# Altium PCB PPSDriver.PcbDoc
Units mil, origin at the board's own origin, x right, y up, seen from the top; angles counter-clockwise.
Board outline 1245 x 800 mil, 2 copper layers (L1, L2), stack 62.8 mil thick; 19 components, 18 nets, 78 pads, 6 vias.
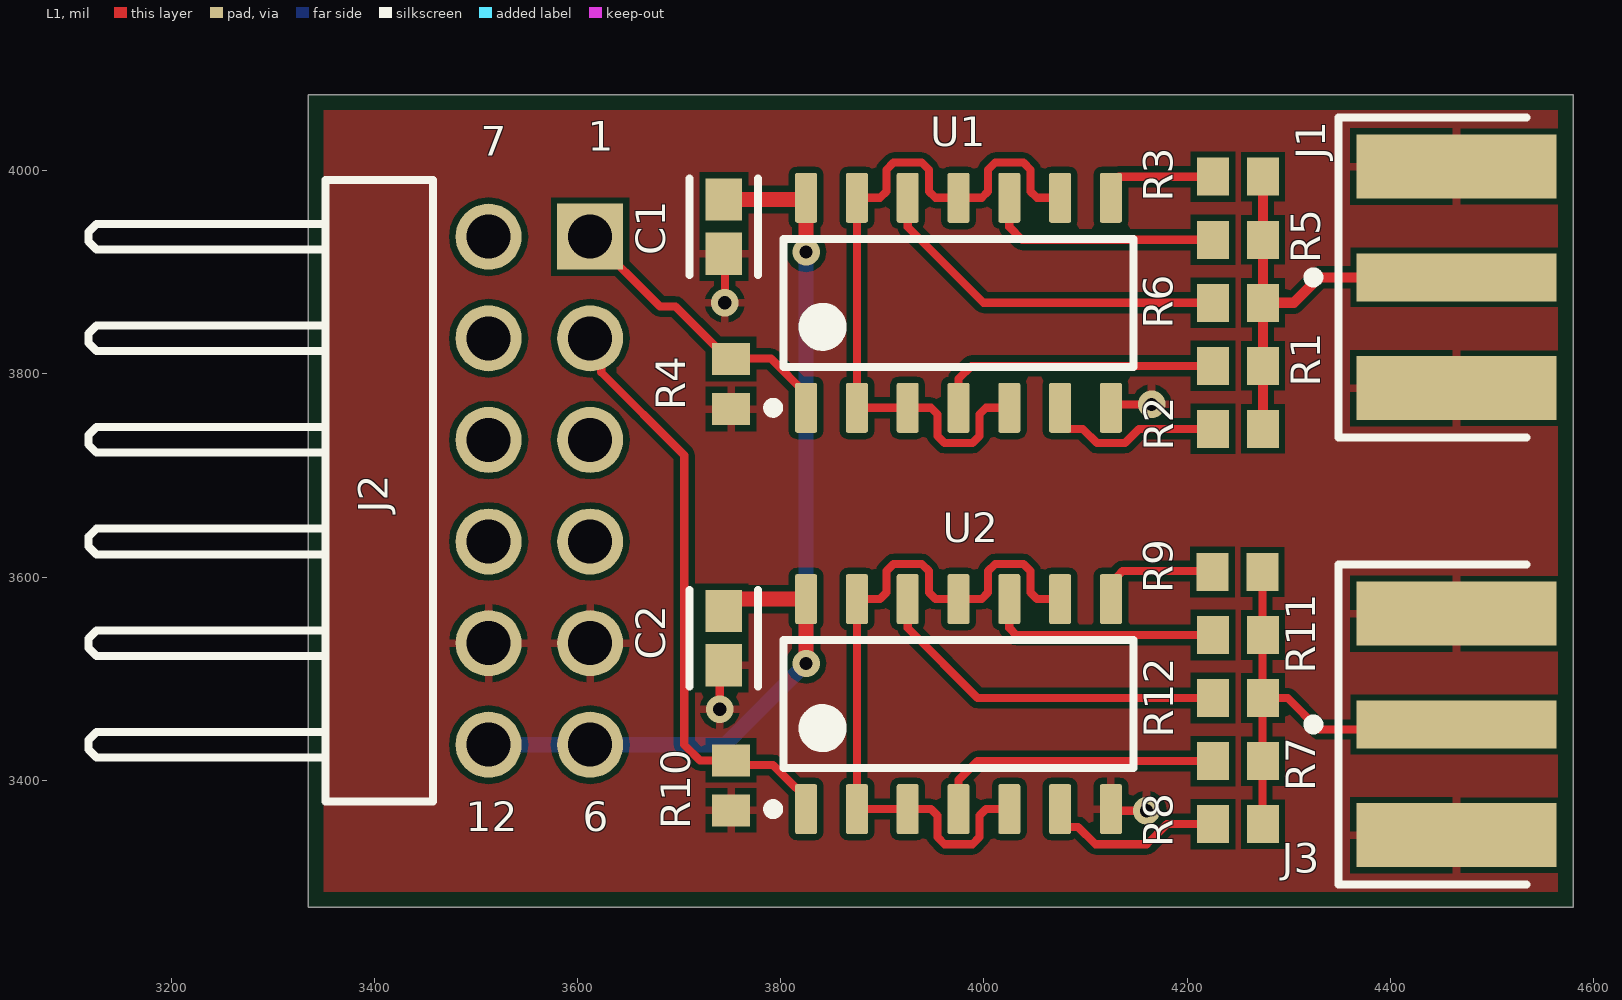
[diagram p0: L1 view]
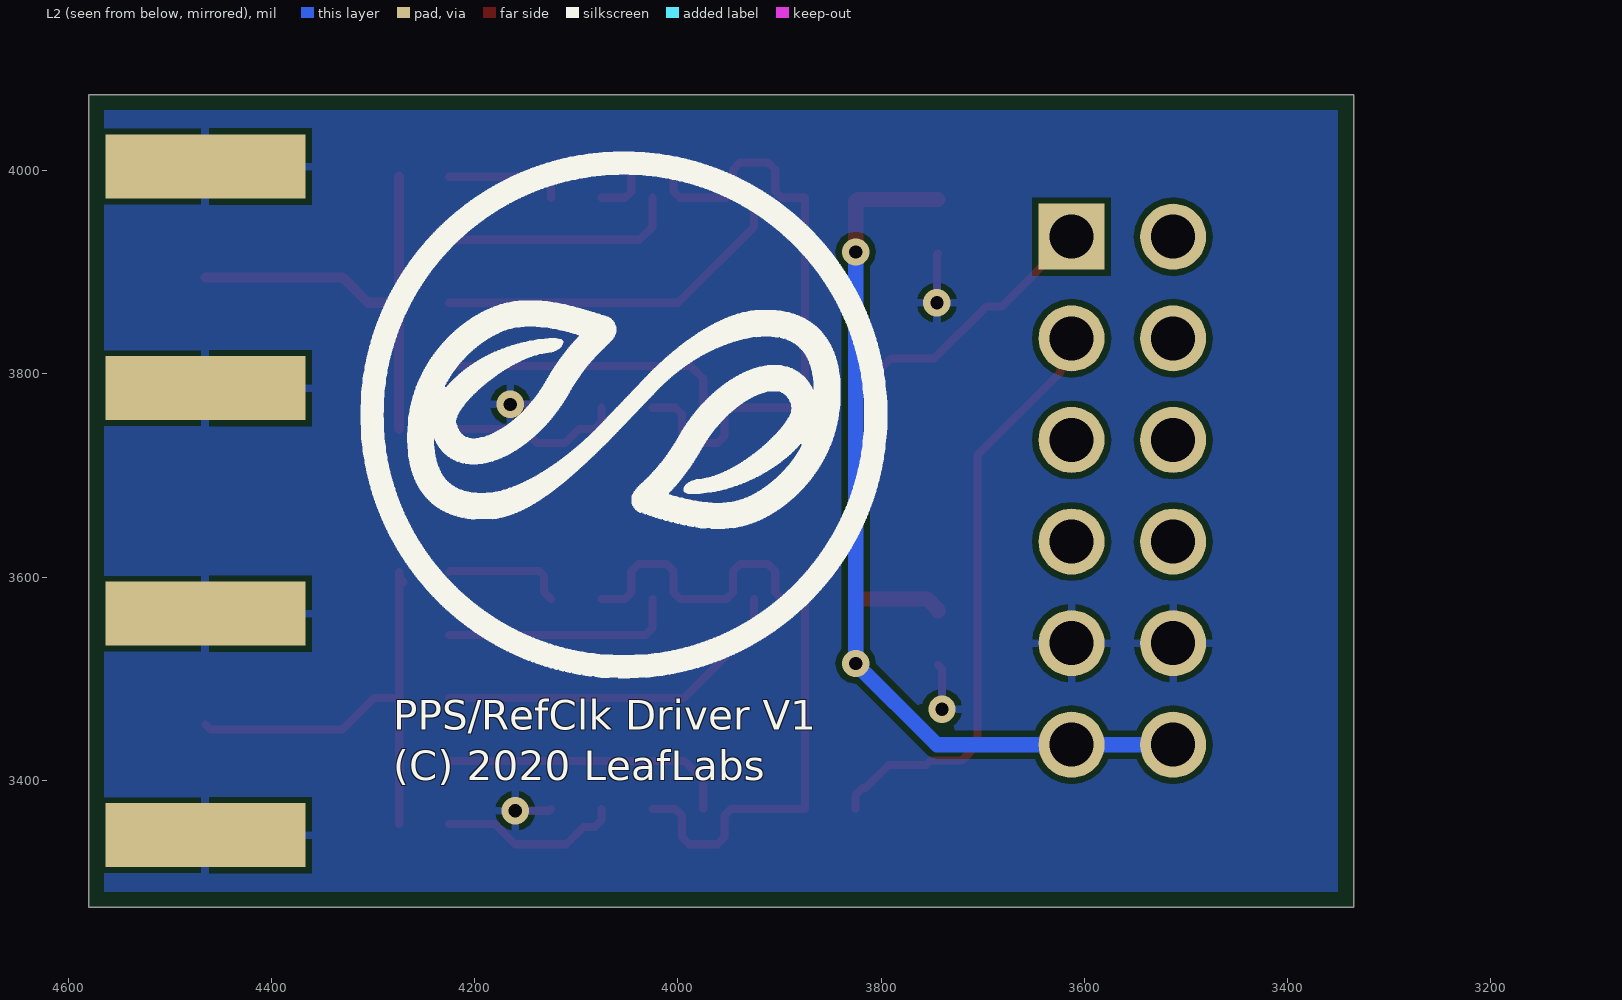
[diagram p1: L2 view, seen from below]

## Layer stack, top to bottom
Top Solder: solder mask 0.1, Solder Resist, Dk 1
L1: signal copper 1.4
Core: core 60, FR-4, Dk 4.6
L2: signal copper 1.4
Bottom Solder: solder mask 0.1, Solder Resist, Dk 1

## Board outline
3335,3275 4580,3275 4580,4075 3335,4075

## Design rules (kind name [scope] priority, off if disabled: settings)
BoardOutlineClearance [All] p1: gap=15 ignorepadtopadclearanceinfootprint=FALSE
Clearance [All] p1: gap=6 ignorepadtopadclearanceinfootprint=FALSE except(0: Arc-Hole Track-Hole SMDPad-Hole THPad-Hole Via-Hole Fill-Hole Poly-Hole Region-Hole Text-Hole)
ComponentClearance [All] p1: gap=1 collisioncheckmode=3 verticalgap=1 showdistances=FALSE
DiffPairsRouting [All] p1: maxlimit=393.7 minlimit=6 mostfreqgap=8 toplayer_minwidth=6 toplayer_maxwidth=15 toplayer_prefwidth=8 bottomlayer_minwidth=6 bottomlayer_maxwidth=15 bottomlayer_prefwidth=8 maxuncoupledlength=500
HoleSize [All] p1: absolutevalues=TRUE maxlimit=265 minlimit=13 maxpercent=80.000 minpercent=20.000
HoleToHoleClearance [All] p1: gap=10 allowstackedmicrovias=FALSE
MinimumAnnularRing [All] p1: minimumring=7
MinimumSolderMaskSliver [All] p1: minsoldermaskwidth=0
PlaneClearance [All] p1: clearance=10
PlaneConnect [All] p1: planeconnectstyle=Direct reliefexpansion=16 reliefentries=4 reliefconductorwidth=6 reliefairgap=6
PolygonConnect [All] p1: connectstyle=Relief reliefconductorwidth=8 reliefentries=4 polygonreliefangle="90 Angle" airgapwidth=6
RoutingCorners [All] p1: cornerstyle=45-Degree minsetback=49.21 maxsetback=49.21
RoutingVias [All] p1: holewidth=15 width=30 viastyle="Through Hole" minholewidth=13 minwidth=27 maxholewidth=100 maxwidth=114
SilkToSilkClearance [All] p1: silktosilkclearance=0
SilkToSolderMaskClearance [IsPad] p1: minsilkscreentomaskgap=6 clearancetoexposedcopper=TRUE
SolderMaskExpansion [All] p1: expansion=2.95 istentingtop=FALSE
Width [All] p1: maxlimit=400 minlimit=6 preferedwidth=8
20 further rules are at their usual default settings.

## Components (designator, comment, footprint, x,y, rotation, side; value= is the part's Value field where it differs from the comment)
C1 "0.1uF" FP-CC0603-DA-IPC_B 3744.03,3945 r270 top value="100 nF"
C2 "0.1uF" FP-CC0603-DA-IPC_B 3744.03,3540 r270 top value="100 nF"
J1 "SMA Edge" FP-CON-SMA-EDGE-S-MFG 4750.83,3895 r270 top
J2 "PMOD" PMOD 3405,3685 r270 top
J3 "SMA Edge" FP-CON-SMA-EDGE-S-MFG 4750.83,3455 r270 top
R1 "220R" RESC1609X50X30NL10T20 4250,3807.97 r0 top
R2 "220R" RESC1609X50X30NL10T20 4250,3745.93 r0 top
R3 "220R" RESC1609X50X30NL10T20 4250,3994.07 r0 top
R4 "100k" RESC1609X50X30NL10T20 3751.16,3790 r90 top
R5 "220R" RESC1609X50X30NL10T20 4250,3932.03 r0 top
R6 "220R" RESC1609X50X30NL10T20 4250,3870 r0 top
R7 "220R" RESC1609X50X30NL10T20 4250,3418.9 r0 top
R8 "220R" RESC1609X50X30NL10T20 4250,3356.87 r0 top
R9 "220R" RESC1609X50X30NL10T20 4249.66,3605 r0 top
R10 "100k" RESC1609X50X30NL10T20 3751.16,3395 r90 top
R11 "220R" RESC1609X50X30NL10T20 4250,3542.97 r0 top
R12 "220R" RESC1609X50X30NL10T20 4250,3480.93 r0 top
U1 "74LVT14D" SOIC14A_L 3975,3870 r90 top
U2 "74LVT14D" SOIC14A_L 3975,3475 r90 top

## Footprints (in the part's own frame and the unit in brackets; to place one, negate y for a bottom-side part, rotate by r counter-clockwise, add the part's x,y. Pads: shape width x height; smd on the part's side, far side on the other; paste and mask are expansions set on the pad)
FP-CC0603-DA-IPC_B [mil]
  rect 41.66x35.91 smd paste+0 mask+0: 1(-26.65,0) 2(26.65,0)
  silkscreen extent -47,-34 47,34, body extent -57,-28 57,28, height 10
FP-CON-SMA-EDGE-S-MFG [mm]
  rect 1.2x5 smd paste+0 mask+0: 1(0,-7.26)
  rect 1.6x5 smd paste+0 mask+0: 2(-2.77,-7.26) 2(2.77,-7.26)
  rect 1.6x5 smd far side paste+0 mask+0: 2(-2.77,-7.26) 2(2.77,-7.26)
  silkscreen extent -4,-10.96 4,-5.5, body extent -3.67,-9.86 3.67,4.86, height 0.25
PMOD [mm] "Pin Header, pitch 2.54 mm, THT, Angled, dual row, 12p"
  rect 1.65x1.65 hole 1.1: 1(-6.35,5.27)
  round 1.65 hole 1.1: 2(-3.81,5.27) 3(-1.27,5.27) 4(1.27,5.27) 5(3.81,5.27) 6(6.35,5.27) 7(-6.35,2.73) 8(-3.81,2.73) 9(-1.27,2.73) 10(1.27,2.73) 11(3.81,2.73) 12(6.35,2.73)
  silkscreen extent -7.77,-7.27 7.77,1.34, body extent -7.62,-7.27 7.62,5.63, height 5.12
RESC1609X50X30NL10T20 [mm] "Chip Resistor, 2-Leads, Body 1.55x0.85mm, IPC Medium Density"
  rect 0.8x0.95 smd: 1(-0.625,0) 2(0.625,0)
  body extent -0.82,-0.48 0.82,0.48, height 0.5
SOIC14A_L [mm] "SOIC, 14-Leads, Body 8.75x4mm, Pitch 1.27mm, IPC High Density"
  rrect18% 1.25x0.55 smd: 1(-2.625,3.81) 2(-2.625,2.54) 3(-2.625,1.27) 4(-2.625,0) 5(-2.625,-1.27) 6(-2.625,-2.54) 7(-2.625,-3.81) 8(2.625,-3.81) 9(2.625,-2.54) 10(2.625,-1.27) 11(2.625,0) 12(2.625,1.27) 13(2.625,2.54) 14(2.625,3.81)
  silkscreen extent -2.75,-4.38 1.6,4.76, body extent -3.02,-4.32 3.02,4.32, height 1.59

## Part data
C1 C2: library part CAP-0603-0.1uF, "CAP CER 0.1UF 16V X7R 0603", Capacitance="100 nF", Manufacturer=YAGEO, Manufacturer Part Number=CC0603KRX7R7BB104, Package=CC0603-DA, Supplier Part Number 1=311-1088-1-ND, Temperature="-55°C to +125°C", Temperature Characteristic=X7R, Temperature Coefficient=15%, Temperature Range High=+125°C, Temperature Range Low=-55°C, Tolerance=0.1, Voltage="16 V", Automotive=No, Category=Cap, ComponentLink2Description=Datasheet, ComponentLink2URL=http://www.yageo.com/documents/recent/UPY-GPHC_X7R_6.3V-to-50V_18.pdf, Device Class L1="Passive Components", Device Class L2=Capacitors, Device Class L3="Ceramic Capacitors", Digikey Description="CAP CER 0.1UF 16V X7R 0603", Footprint Url=http://www.yageo.com/exep/pages/download/literatures/UPY-C_GEN_24.pdf, Height=0.9mm, Lead Free=Yes, Material=Ceramic, Mouser Description="Multilayer Ceramic Capacitor, CC Series, 0.1 - F, - 10%, X7R, 16 V, 0603 [1608 Metric]", Octopart=https://octopart.com/cc0603krx7r7bb104-yageo-192941, RoHS=TRUE, Supplier 1=Digi-Key, Voltage Rating="16 V"
J1 J3: library part SMA_EDGE, "50 Ohm Edge mount SMA"
J2: library part PMOD-TH, "PMOD Connector, Through Hole, Standard pinout", Contact Resistance=20mOhm, Rated Current=3A, Supplier Part Number 1=732-5354-ND, Withstanding Voltage=500VAC, Gender=Male, Orientation=Angled, Pin Number=12, Pitch=2.54mm, Publisher=WurthElektronik, Row Number=Dual, Supplier 1=Digi-Key
R1 R2 R3 R5 R6 R7 R8 R9 R11 R12: library part RES-0603-220R, "Resistor 0603 220 Ohm", Supplier Part Number 1=311-220GRCT-ND, Supplier 1=Digi-Key
R4 R10: library part RES-0603-100k, "Resistor 0603 100k Ohm", Supplier Part Number 1=YAG2294CT-ND, Supplier 1=Digi-Key
U1 U2: "Hex Schmitt-Trigger Inverters, D0014A, LARGE T&R", Generic Part Number=74LVT14, Supplier Part Number 1=1727-6371-1-ND, Input Type=CMOS, Output Type=CMOS, Schmitt Trigger=Yes, Supplier 1=Digi-Key

## Via types
v1: diameter 27, hole 13, L1 to L2, 6 vias

## Nets (pads, with @x,y where several pads share a name; then routed paths per layer and width w, separated by ;. In a path a pad name is that pad's centre, name@x,y a point inside that pad or via, vN(x,y) a via of type N, cw(c..) or ccw(c..) an arc to the next point about the centre after c; other vN are vias at no path point)
+3v3: C1.1 C2.1 J2.6 J2.12 U1.14 U2.14 | length 1032.2
  L1 w15: C2.1 3744.03,3567.89 3754.48,3578.35 U2.14 v1(3825,3515) ; C1.1 3823.31,3971.65 3825,3969.96 v1(3825,3920)
  L2 w15: J2.12 J2.6 3745,3435 v1(3825,3515) v1(3825,3920)
GND: C1.2 C2.2 J1.2 J2.5 J2.11 J3.2 R4.1 R10.1 U1.7 U2.7 | length 170.8
  L1 w8: v1(3740,3470) 3740,3509.32 C2.2 ; C1.2 3745,3917.37 v1(3745,3870) ; U2.7 4126.65,3370 v1(4160,3370) ; U1.7 4128.35,3770 v1(4165,3770)
NetJ1_1: J1.1 R1.2 R2.2 R3.2 R5.2 R6.2 | length 448.9
  L1 w10: R2.2 R1.2 R6.2 ; R3.2 R5.2 R6.2 ; J1.1 4330,3895 4305,3870 R6.2
NetJ2_1: J2.1 R4.2 U1.1 | length 290.6
  L1 w8: J2.1 3681.04,3866.44 3696.37,3866.44 3748.2,3814.61 3748.6,3815 3790.43,3815 3825,3780.43 U1.1
NetJ2_2: J2.2 R10.2 U2.1 | length 592.6
  L1 w8: J2.2 3623.38,3824.1 3623.38,3801.62 3705,3720 3705,3435 3720.39,3419.61 R10.2 3755.76,3415 3792.46,3415 3815.2,3392.26 3818.17,3392.26 3825,3385.43 U2.1
NetJ3_1: J3.1 R7.2 R8.2 R9.2 R11.2 R12.2 | length 459.6
  L1 w8: R9.2@4270,3595 R9.2@4274.27,3599.27 ; R9.2 R9.2@4274.27,3599.27 ; R8.2 4274.27,3357.21 R9.2@4274.27,3599.27 ; R12.2 4299.07,3480.93 4330,3450 4460,3450 J3.1
NetR1_1: R1.1 U1.4 | length 284.3
  L1 w8: U1.4 3975,3795.26 3987.71,3807.97 R1.1
NetR2_1: R2.1 U1.6 | length 178.6
  L1 w8: U1.6 4075,3752.87 4081.83,3746.05 4082.77,3746.05 4082.89,3745.93 4097.29,3745.93 4111.17,3732.05 4138.83,3732.05 4152.71,3745.93 R2.1
NetR3_1: R3.1 U1.8 | length 117
  L1 w8: U1.8 4125,3987.13 4131.83,3993.95 4132.77,3993.95 4132.89,3994.07 R3.1
NetR5_1: R5.1 U1.10 | length 234.3
  L1 w8: U1.10 4025,3944.74 4037.71,3932.03 R5.1
NetR6_1: R6.1 U1.12 | length 360
  L1 w8: U1.12 3925,3944.74 3999.74,3870 R6.1
NetR7_1: R7.1 U2.4 | length 286.7
  L1 w8: U2.4 3975,3400.26 3993.64,3418.9 R7.1
NetR8_1: R8.1 U2.6 | length 179.2
  L1 w8: U2.6 4075,3361 4081.83,3354.17 4092.78,3354.17 4109.91,3337.05 4160.28,3337.05 4180.1,3356.87 R8.1
NetR9_1: R9.1 U2.8 | length 121.3
  L1 w8: U2.8 4131.83,3585.17 4131.83,3601.29 4136.51,3605.98 4224.08,3605.98 R9.1
NetR11_1: R11.1 U2.10 | length 231.8
  L1 w8: U2.10 4025,3549.74 4031.77,3542.97 R11.1
NetR12_1: R12.1 U2.12 | length 357.5
  L1 w8: U2.12 3925,3549.74 3993.81,3480.93 R12.1
NetU1_2: U1.2 U1.3 U1.5 U1.9 U1.11 U1.13 | length 717.4
  L1 w8: U1.5 4002.17,3766.65 3995.83,3760.31 3995.83,3739.05 3988.83,3732.05 3961.17,3732.05 3954.17,3739.05 3954.17,3760.31 3947.83,3766.65 U1.3 U1.2 U1.13 3897.83,3973.35 3904.17,3979.69 3904.17,4000.95 3911.17,4007.95 3938.83,4007.95 3945.83,4000.95 3945.83,3979.69 3952.17,3973.35 U1.11 3997.83,3973.35 4004.17,3979.69 4004.17,4000.95 4011.17,4007.95 4038.83,4007.95 4045.83,4000.95 4045.83,3979.69 4052.17,3973.35 U1.9
NetU2_2: U2.2 U2.3 U2.5 U2.9 U2.11 U2.13 | length 717.4
  L1 w8: U2.5 4002.17,3371.65 3995.83,3365.31 3995.83,3344.05 3988.83,3337.05 3961.17,3337.05 3954.17,3344.05 3954.17,3365.31 3947.83,3371.65 U2.3 U2.2 U2.13 3897.83,3578.35 3904.17,3584.69 3904.17,3605.95 3911.17,3612.95 3938.83,3612.95 3945.83,3605.95 3945.83,3584.69 3952.17,3578.35 U2.11 3997.83,3578.35 4004.17,3584.69 4004.17,3605.95 4011.17,3612.95 4038.83,3612.95 4045.83,3605.95 4045.83,3584.69 4052.17,3578.35 U2.9
pads on no net: J2.3 J2.4 J2.7 J2.8 J2.9 J2.10

## Polygon pours and split planes (outlines as drawn)
GND on L2 "GND_L02_P001" (solid, pour order 1): 3350,4075 4580,4075 4580,3275 3350,3275
GND on L1 "GND_L01_P000" (solid, pour order 0): 3350,4075 4580,4075 4580,3275 3350,3275

## Silkscreen, mask and mechanical layers (free items; w line width, h text height)
Bottom Overlay:
  drawing of 2 lines, arcs and shapes, not listed
  text "PPS/RefClk Driver V1 / (C) 2020 LeafLabs" at 4280,3390 h50
Mechanical 1:
  the board outline again, w10

## Text inside footprints (layer, text, board x,y; h text height)
J2: Top Overlay "1" at 3610,4010 h50; Top Overlay "7" at 3505,4005 h50; Top Overlay "12" at 3490,3340 h50; Top Overlay "6" at 3605,3340 h50